# Altium PCB Z80-ays.PcbDoc
Units mil, origin at the board's own origin, x right, y up, seen from the top; angles counter-clockwise.
Board outline 3800 x 3500 mil, 2 copper layers (TopLayer, BottomLayer); 58 components, 79 nets, 269 pads, 31 vias.
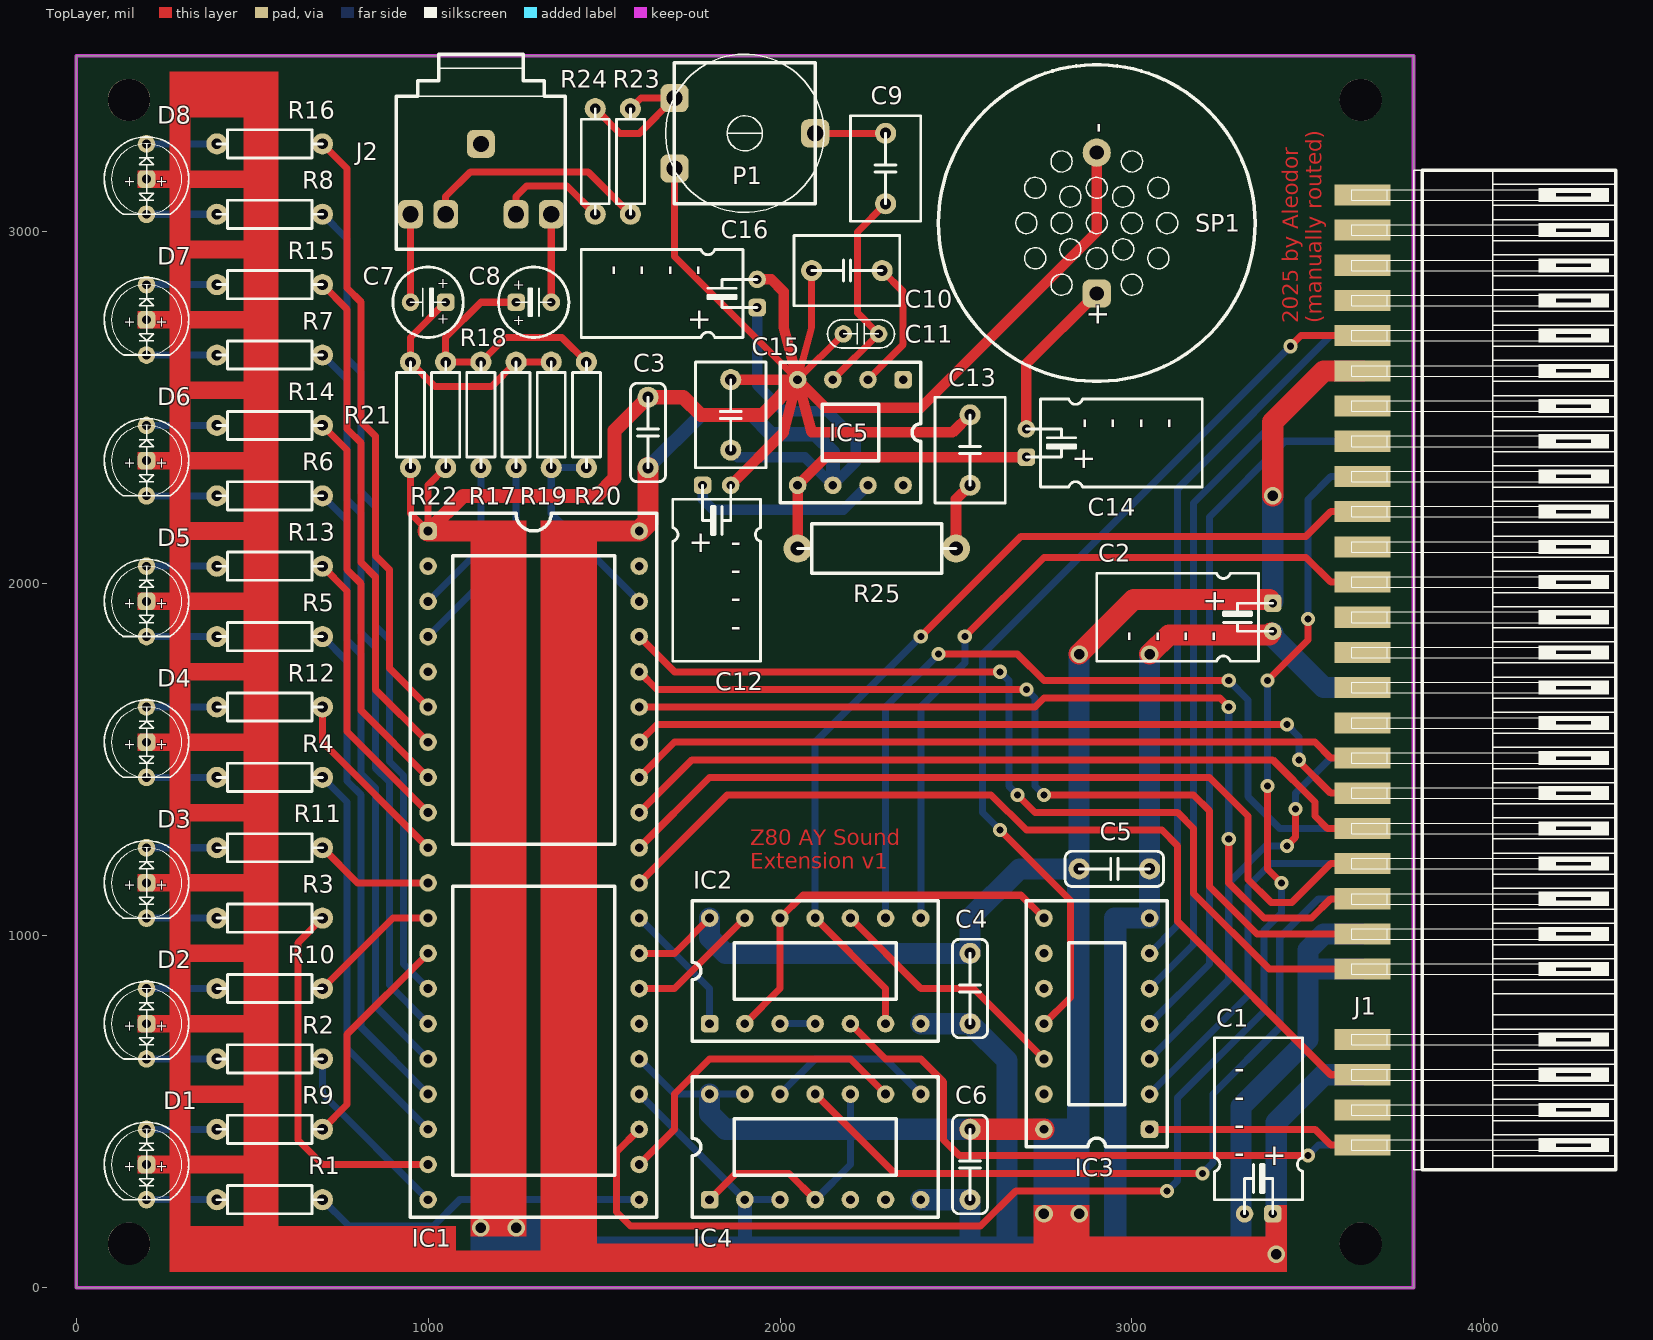
[diagram p0: TopLayer view]
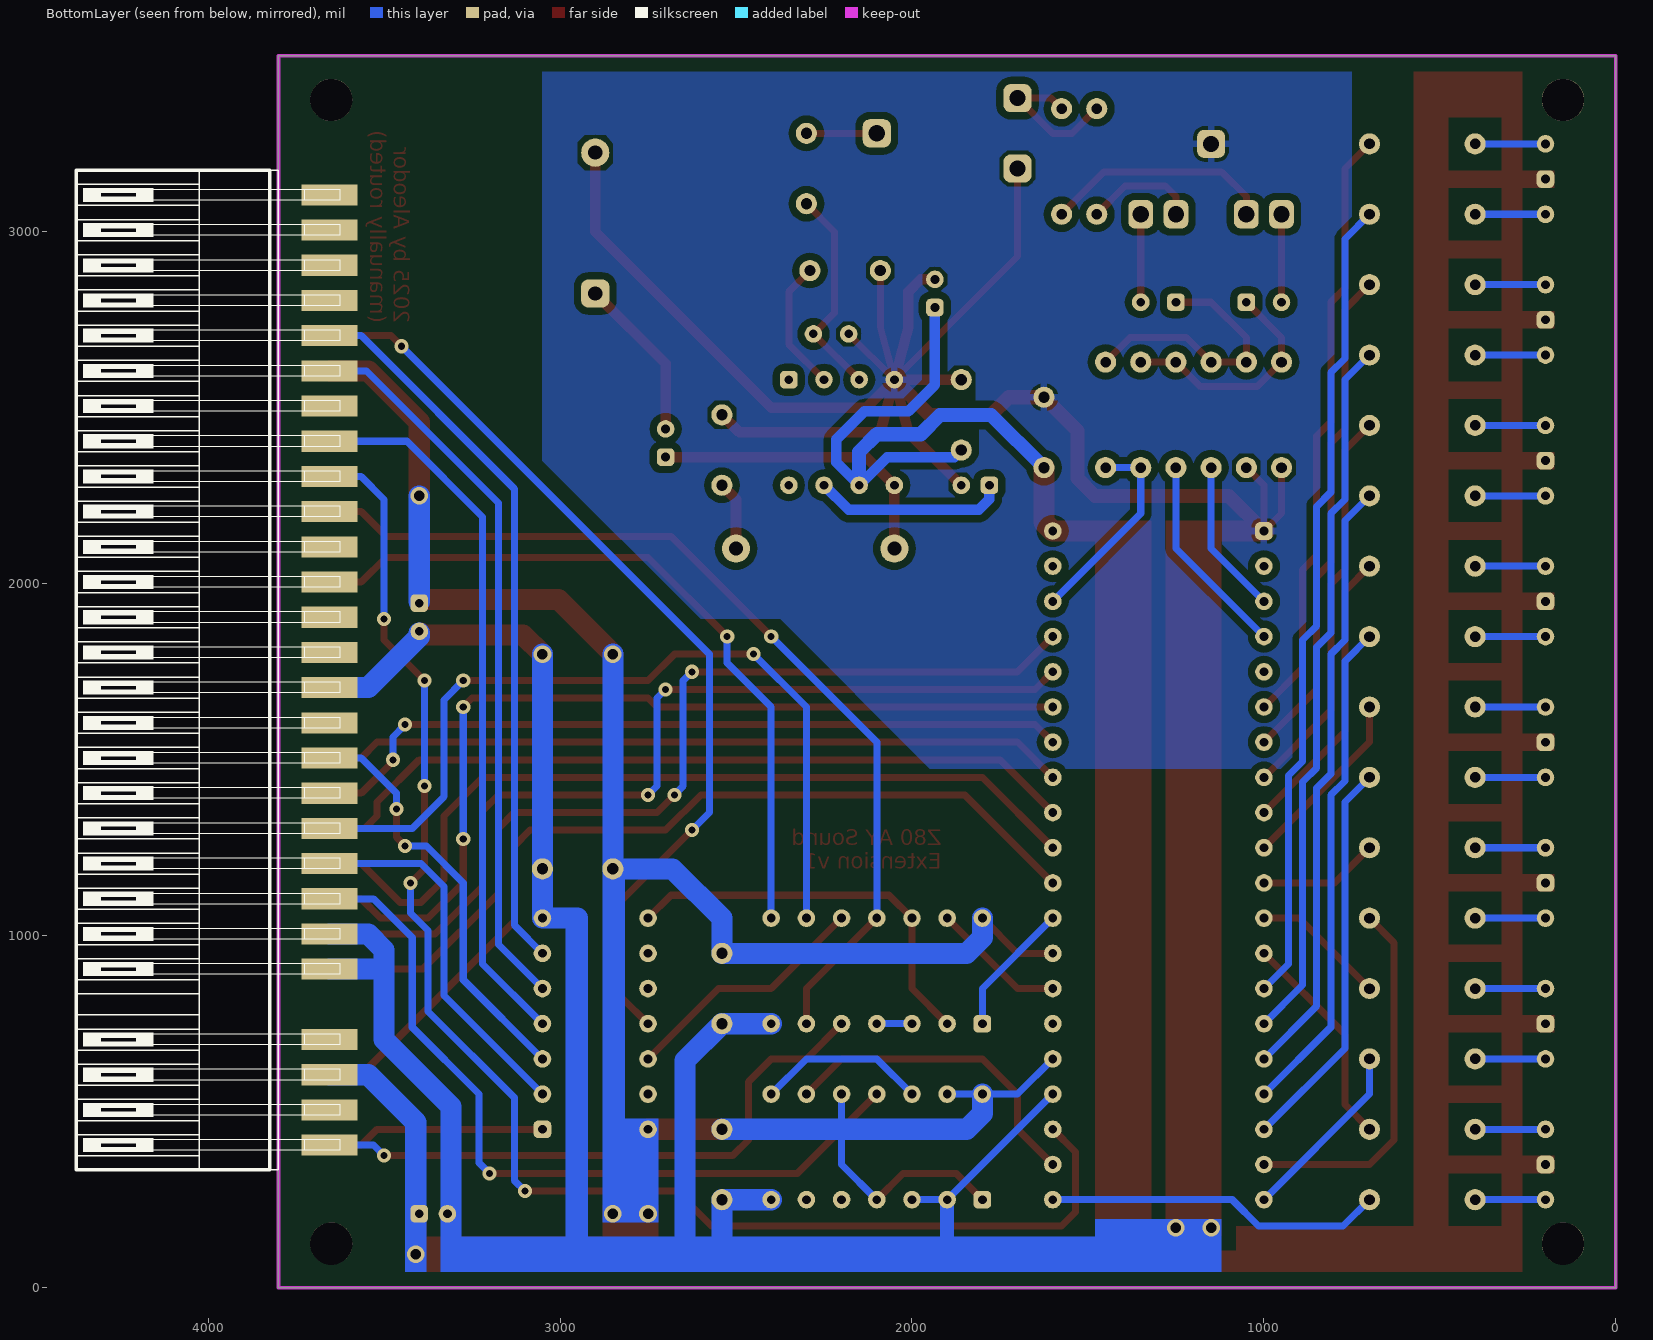
[diagram p1: BottomLayer view, seen from below]

## Layer stack, top to bottom
TopSolder: solder mask 0.4, Solder Resist, Dk 3.5
TopLayer: signal copper 1.4
Dielectric1: core 12.6, FR-4, Dk 4.8
BottomLayer: signal copper 1.4
BottomSolder: solder mask 0.4, Solder Resist, Dk 3.5

## Board outline
0,0 0,3500 3800,3500 3800,0

## Design rules (kind name [scope] priority, off if disabled: settings)
AcuteAngle [All] p1: minimum=6.00000000000000E+0001 checktracksonly=FALSE
Clearance Clearance_Track-Track [(IsTrack) vs (IsTrack)] p1: gap=20
Clearance Clearance_Track-Fill [(IsTrack) vs (IsFill)] p2: gap=20
Clearance Clearance_Fill-Fill [(IsFill) vs (IsFill)] p3: gap=40
Clearance Clearance_All-All [All] p4: gap=20
ComponentClearance [All] p1: gap=0 collisioncheckmode=3 verticalgap=0 showdistances=FALSE
FabricationTestPointUsage TestPointUsage [All] p1: valid=0 allowmultiple=FALSE
FabricationTestpoint Testpoint [All] p1: side=3 testpointundercomponent=TRUE minsize=40 maxsize=100 preferedsize=60 minholesize=0 maxholesize=40 preferedholesize=32 testpointgrid=1 allowsidetop=TRUE allowsidebottom=TRUE usegrid=TRUE gridtolerance=0.01
Height [All] p1: minheight=0 maxheight=0 prefheight=0
HoleSize [All] p1: absolutevalues=TRUE maxlimit=120 minlimit=20 maxpercent=80.000 minpercent=20.000
HoleToHoleClearance [All] p1: gap=20 allowstackedmicrovias=TRUE
PolygonConnect PolygonConnect_Via [(IsVia)] p1: connectstyle=Direct reliefconductorwidth=10 reliefentries=4 polygonreliefangle="90 Angle" airgapwidth=10
PolygonConnect [All] p2: connectstyle=Relief reliefconductorwidth=20 reliefentries=4 polygonreliefangle="90 Angle" airgapwidth=10
RoutingVias [All] p1: holewidth=20 width=40 viastyle="Through Hole" minholewidth=20 minwidth=40 maxholewidth=30 maxwidth=50
SilkToSolderMaskClearance SilkscreenOverComponentPads [IsPad] p1: minsilkscreentomaskgap=10 clearancetoexposedcopper=TRUE
SolderMaskExpansion [All] p1: expansion=4
Width [All] p1: maxlimit=100 minlimit=10 preferedwidth=10
23 further rules are at their usual default settings.

## Classes and differential pairs
net class DB[7..0]: DB0 DB1 DB2 DB3 DB4 DB5 DB6 DB7
net class AB[15..0]: AB0 AB1 AB2 AB3 AB4 AB5 AB6 AB7 AB8 AB9 AB10 AB11 AB12 AB13 AB14 AB15

## Components (designator, comment, footprint, x,y, rotation, side; value= is the part's Value field where it differs from the comment)
C1 "100u" C-ELKO_2D6L11.7 3360,210 r180 top locked
C2 "100u" C-ELKO_2D6L11.7 3400,1905 r270 top locked
C3 "120n" C-CER_0.2W2.5L7 1625,2430 r90 top locked
C4 "120n" C-CER_0.2W2.5L7 2540,850 r270 top locked
C5 "120n" C-CER_0.2W2.5L7 2950,1190 r0 top locked
C6 "120n" C-CER_0.2W2.5L7 2540,350 r270 top locked
C7 "10u" C-ELKO_0.1D5 1000,2800 r180 top locked
C8 "10u" C-ELKO_0.1D5 1300,2800 r0 top locked
C9 "220n" C-FILM_0.2W5L7.5 2300,3180 r270 top locked
C10 "220n" C-FILM_0.2W5L7.5 2190,2890 r180 top locked
C11 "220p" C-CER_0.1W2L4.8 2230,2710 r180 top locked
C12 "100u" C-ELKO_2D6L11.7 1820,2280 r0 top locked
C13 "220n" C-FILM_0.2W5L7.5 2540,2380 r270 top locked
C14 "220u" C-ELKO_2D6L11.7 2700,2400 r90 top locked
C15 "220n" C-FILM_0.2W5L7.5 1860,2480 r90 top locked
C16 "220u" C-ELKO_2D6L11.7R 1935,2825 r270 top locked
D1 "LDRG" LED_0.1X2D5 200,350 r270 top locked
D2 "LDRG" LED_0.1X2D5 200,750 r270 top locked
D3 "LDRG" LED_0.1X2D5 200,1150 r270 top locked
D4 "LDRG" LED_0.1X2D5 200,1550 r270 top locked
D5 "LDRG" LED_0.1X2D5 200,1950 r270 top locked
D6 "LDRG" LED_0.1X2D5 200,2350 r270 top locked
D7 "LDRG" LED_0.1X2D5 200,2750 r270 top locked
D8 "LDRG" LED_0.1X2D5 200,3150 r270 top locked
IC1 "AY3-8910" IC40_DIP_W 1300,1200 r0 top locked
IC2 "74HCT02" IC14_DIP 2100,900 r90 top locked
IC3 "74HCT30" IC14_DIP 2900,750 r180 top locked
IC4 "74HCT74" IC14_DIP 2100,400 r90 top locked
IC5 "LM386" IC8_DIP 2200,2430 r270 top locked
J1 "HC-EXT_28X2" ISA_TH/SMD_28X2 4000,1755 r270 top locked
J2 "JACK_ST" JACK_ST_SW 1150,3250 r0 top locked
P1 "10K" POT-B_10x10 1900,3280 r270 top locked
R1 "3K3" AXIAL_0.3D2 550,250 r180 top locked
R2 "3K3" AXIAL_0.3D2 550,650 r180 top locked
R3 "3K3" AXIAL_0.3D2 550,1050 r180 top locked
R4 "3K3" AXIAL_0.3D2 550,1450 r180 top locked
R5 "3K3" AXIAL_0.3D2 550,1850 r180 top locked
R6 "3K3" AXIAL_0.3D2 550,2250 r180 top locked
R7 "3K3" AXIAL_0.3D2 550,2650 r180 top locked
R8 "3K3" AXIAL_0.3D2 550,3050 r180 top locked
R9 "10K" AXIAL_0.3D2 550,450 r180 top locked
R10 "10K" AXIAL_0.3D2 550,850 r180 top locked
R11 "10K" AXIAL_0.3D2 550,1250 r180 top locked
R12 "10K" AXIAL_0.3D2 550,1650 r180 top locked
R13 "10K" AXIAL_0.3D2 550,2050 r180 top locked
R14 "10K" AXIAL_0.3D2 550,2450 r180 top locked
R15 "10K" AXIAL_0.3D2 550,2850 r180 top locked
R16 "10K" AXIAL_0.3D2 550,3250 r180 top locked
R17 "390" AXIAL_0.3D2 1250,2480 r90 top locked
R18 "390" AXIAL_0.3D2 1150,2480 r90 top locked
R19 "820" AXIAL_0.3D2 1350,2480 r90 top locked
R20 "820" AXIAL_0.3D2 1450,2480 r90 top locked
R21 "470" AXIAL_0.3D2 950,2480 r270 top locked
R22 "470" AXIAL_0.3D2 1050,2480 r270 top locked
R23 "10K" AXIAL_0.3D2 1575,3200 r90 top locked
R24 "10K" AXIAL_0.3D2 1475,3200 r270 top locked
R25 "10W" AXIAL_0.45D3.5 2275,2100 r0 top locked
SP1 "8W" SPKR_8.8D23 2900,3025 r90 top locked

## Footprints (in the part's own frame and the unit in brackets; to place one, negate y for a bottom-side part, rotate by r counter-clockwise, add the part's x,y. Pads: shape width x height; smd on the part's side, far side on the other; paste and mask are expansions set on the pad)
AXIAL_0.3D2 [mil]
  round 60 hole 30: 1(-150,0) 2(150,0)
  silkscreen extent -150,-40 150,40
AXIAL_0.45D3.5 [mil]
  round 80 hole 40: 1(-225,0) 2(225,0)
  silkscreen extent -225,-70 225,70
C-CER_0.1W2L4.8 [mil]
  round 50 hole 24: 1(-50,0) 2(50,0)
  silkscreen extent -95,-40 95,40
C-CER_0.2W2.5L7 [mil]
  round 60 hole 32: 1(-100,0) 2(100,0)
  silkscreen extent -140,-50 140,50
C-ELKO_0.1D5 [mil]
  rrect50% 50x50 hole 25: 1(-50,0)
  round 50 hole 25: 2(50,0)
  silkscreen extent -100,-100 100,100
C-ELKO_2D6L11.7 [mil]
  rrect50% 50x50 hole 25: 1(-40,0)
  round 50 hole 25: 2(40,0)
  silkscreen extent -125,-500 125,0
C-ELKO_2D6L11.7R [mil]
  rrect50% 50x50 hole 25: 1(40,0)
  round 50 hole 25: 2(-40,0)
  silkscreen extent -125,-500 125,0
C-FILM_0.2W5L7.5 [mil]
  round 60 hole 32: 1(-100,0) 2(100,0)
  silkscreen extent -150,-100 150,100
IC8_DIP [mil]
  rrect50% 50x50 hole 25: 1(-150,150)
  round 50 hole 25: 2(-150,50) 3(-150,-50) 4(-150,-150) 5(150,-150) 6(150,-50) 7(150,50) 8(150,150)
  silkscreen extent -200,-200 200,200
IC14_DIP [mil]
  rrect50% 50x50 hole 25: 1(-150,300)
  round 50 hole 25: 2(-150,200) 3(-150,100) 4(-150,0) 5(-150,-100) 6(-150,-200) 7(-150,-300) 8(150,-300) 9(150,-200) 10(150,-100) 11(150,0) 12(150,100) 13(150,200) 14(150,300)
  silkscreen extent -200,-350 200,350
IC40_DIP_W [mil]
  rrect50% 50x50 hole 25: 1(-300,950)
  round 50 hole 25: 2(-300,850) 3(-300,750) 4(-300,650) 5(-300,550) 6(-300,450) 7(-300,350) 8(-300,250) 9(-300,150) 10(-300,50) 11(-300,-50) 12(-300,-150) 13(-300,-250) 14(-300,-350) 15(-300,-450) 16(-300,-550) 17(-300,-650) 18(-300,-750) 19(-300,-850) 20(-300,-950) 21(300,-950) 22(300,-850) 23(300,-750) 24(300,-650) 25(300,-550) 26(300,-450) 27(300,-350) 28(300,-250) 29(300,-150) 30(300,-50) 31(300,50) 32(300,150) 33(300,250) 34(300,350) 35(300,450) 36(300,550) 37(300,650) 38(300,750) 39(300,850) 40(300,950)
  silkscreen extent -350,-1000 350,1000
ISA_TH/SMD_28X2 [mil]
  rect 60x160 smd: 1(1350,-345) 3(1250,-345) 5(1150,-345) 7(1050,-345) 11(850,-345) 13(750,-345) 15(650,-345) 17(550,-345) 19(450,-345) 21(350,-345) 23(250,-345) 25(150,-345) 27(50,-345) 29(-50,-345) 31(-150,-345) 33(-250,-345) 35(-350,-345) 37(-450,-345) 39(-550,-345) 41(-650,-345) 43(-750,-345) 45(-850,-345) 47(-950,-345) 49(-1050,-345) 51(-1150,-345) 53(-1250,-345) 55(-1350,-345)
  rect 60x160 smd far side: 2(1350,-345) 4(1250,-345) 6(1150,-345) 8(1050,-345) 12(850,-345) 14(750,-345) 16(650,-345) 18(550,-345) 20(450,-345) 22(350,-345) 24(250,-345) 26(150,-345) 28(50,-345) 30(-50,-345) 32(-150,-345) 34(-250,-345) 36(-350,-345) 38(-450,-345) 40(-550,-345) 42(-650,-345) 44(-750,-345) 46(-850,-345) 48(-950,-345) 50(-1050,-345) 52(-1150,-345) 54(-1250,-345) 56(-1350,-345)
  silkscreen extent -1420,-375 1420,375
JACK_ST_SW [mil]
  round 40 on Top Overlay: 0(-200,0) 0(-200,100) 0(0,-200) 0(200,0) 0(200,100)
  rrect50% 80x80 hole 46: 1(0,0)
  rrect50% 70x80 hole 46: 2(200,-200) 3(100,-200) 4(-100,-200) 5(-200,-200)
  silkscreen extent -240,-300 240,255
LED_0.1X2D5 [mil]
  rrect50% 50x50 hole 25: A(0,0)
  round 50 hole 25: K1(100,0) K2(-100,0)
  silkscreen extent -120,-120 100,120
POT-B_10x10 [mil]
  rrect50% 80x80 hole 46: 1(-100,-200) 2(100,-200) 3(0,200)
  silkscreen extent -225,-225 225,225
SPKR_8.8D23 [mil]
  rrect50% 80x80 hole 40: 1(-200,0)
  round 80 hole 40: 2(200,0)
  silkscreen extent -450,-450 450,450

## Part data
C1 C2 C7 C8 C12 C14 C16: library part C-ELKO_20MIL
C3 C4 C5 C6 C9 C10 C11 C13 C15: library part CAP_20MIL
D1 D2 D3 D4 D5 D6 D7 D8: library part LED_AKK
J2: library part JACK_ST_SW
P1: library part POT-20MIL
R1 R2 R3 R4 R5 R6 R7 R8 R9 R10 R11 R12 R13 R14 R15 R16 R17 R18 R19 R20 R21 R22 R23 R24: library part RES-20MIL
R25: library part RES-30MIL
SP1: library part SPEAKER

## Free pads (board coordinates)
  round 120 hole 120 unplated: 0(150,125) 0(150,3375) 0(3650,125) 0(3650,3375)

## Via types
v1: diameter 40, hole 20, TopLayer to BottomLayer, 23 vias
v2: diameter 50, hole 30, TopLayer to BottomLayer, 8 vias

## Nets (pads, with @x,y where several pads share a name; then routed paths per layer and width w, separated by ;. In a path a pad name is that pad's centre, name@x,y a point inside that pad or via, vN(x,y) a via of type N, cw(c..) or ccw(c..) an arc to the next point about the centre after c; other vN are vias at no path point)
AB0: IC3.2 J1.18 | length 1057.9
  BottomLayer w20: IC3.2 3330,830 3330,1140 3395,1205 J1.18
AB1: IC2.9 J1.20 | length 2383.3
  TopLayer w20: v1(2450,1800) 2675,1800 2750,1725 v1(3275,1725)
  BottomLayer w20: IC2.9 2300,1650 v1(2450,1800) ; v1(3275,1725) 3330,1670 3330,1395 3420,1305 J1.20
AB3: IC3.3 J1.24 | length 1193.5
  TopLayer w20: v1(3440,1255) 3465,1280 v1(3465,1360)
  BottomLayer w20: IC3.3 3275,875 3275,1150 3380,1255 v1(3440,1255) ; v1(3465,1360) 3465,1405 3565,1505 J1.24
AB4: IC3.6 J1.48 | length 2058.3
  BottomLayer w20: IC3.6 3130,1030 3130,2270 3565,2705 J1.48
AB5: IC3.5 J1.46 | length 2067.1
  BottomLayer w20: IC3.5 3175,975 3175,2230 3550,2605 J1.46
AB7: IC3.4 J1.42 | length 2034.5
  BottomLayer w20: IC3.4 3220,920 3220,2190 3435,2405 J1.42
AB14: IC2.5 J1.2 | length 1719.4
  TopLayer w20: IC2.5 2300,650 2400,650 2465,585 2465,420 2510,375 v1(3500,375)
  BottomLayer w20: v1(3500,375) 3530,405 J1.2
AB15: IC3.1 J1.1 | length 623.6
  TopLayer w20: IC3.1 3520,450 3565,405 J1.1
CASL: IC4.11 J1.16 | length 2234.9
  TopLayer w20: IC4.11 2325,325 v1(3200,325)
  BottomLayer w20: v1(3200,325) 3230,355 3230,550 3420,740 3420,995 3530,1105 J1.16
DB0: IC1.37 J1.11 | length 2730.5
  TopLayer w20: IC1.37 1700,1750 v1(2625,1750) ; v1(2675,1400) 2725,1350 3130,1350 3175,1305 3175,1120 3390,905 J1.11
  BottomLayer w20: v1(2625,1750) 2650,1725 2650,1425 v1(2675,1400)
DB1: IC1.36 J1.13 | length 2636
  TopLayer w20: IC1.36 1650,1700 v1(2700,1700) ; v1(2750,1400) 3175,1400 3220,1355 3220,1140 3355,1005 J1.13
  BottomLayer w20: v1(2700,1700) 2725,1675 2725,1425 v1(2750,1400)
DB2: IC1.35 J1.15 | length 2639.9
  TopLayer w20: IC1.35 2725,1650 2750,1675 3250,1675 v1(3275,1650) ; v1(3275,1275) 3275,1150 3375,1050 3510,1050 3565,1105 J1.15
  BottomLayer w20: v1(3275,1275) v1(3275,1650)
DB3: IC1.34 J1.21 | length 2197.5
  TopLayer w20: IC1.34 1650,1600 v1(3440,1600) ; v1(3475,1500) 3475,1495 3565,1405 J1.21
  BottomLayer w20: v1(3440,1600) 3475,1565 v1(3475,1500)
DB4: IC1.33 J1.23 | length 2115.1
  TopLayer w20: IC1.33 1700,1550 3520,1550 3565,1505 J1.23
DB5: IC1.32 J1.19 | length 2221.3
  TopLayer w20: IC1.32 1750,1500 3400,1500 3520,1380 3520,1340 3555,1305 J1.19
DB6: IC1.31 J1.17 | length 2435.9
  TopLayer w20: IC1.31 1800,1450 3220,1450 3330,1340 3330,1160 3395,1095 3455,1095 3565,1205 J1.17
DB7: IC1.30 J1.5 | length 2613.8
  TopLayer w20: IC1.30 1850,1400 2600,1400 2700,1300 3085,1300 3130,1255 3130,1040 3565,605 J1.5
GND: C1.2 C2.2 C3.2 C4.2 C5.2 C6.2 C10.2 C11.2 C12.2 C13.1 C15.2 C16.2 IC1.1 IC1.24 IC2.7 IC3.7 IC4.2 IC4.3 IC4.7 IC5.4 J1.12 J1.14 J1.28 J2.1 P1.2 R21.2 R22.2 SP1.2 | length 10017.4
  TopLayer w20: R21.2 950,2200 IC1.1 1000,2280 R22.2 ; P1.2 1700,2930 IC5.4 ; C10.2 2090,2730 IC5.4 ; C11.2 IC5.4
  TopLayer w30: C12.2 2010,2430 IC5.4 ; C15.2 IC5.4 ; C16.2 1975,2865 2010,2830 2010,2730 IC5.4 ; C13.1 2490,2430 2090,2430 IC5.4 ; SP1.2 2900,3000 2400,2500 2130,2500 IC5.4
  TopLayer w40: IC1.1 1100,2250 1480,2250 1530,2300 1530,2435 C3.2 1725,2530 1775,2480 1950,2480 IC5.4
  TopLayer w60: IC1.1 1120,2150 ; v2(3050,1800) 3105,1855 3390,1855 C2.2@3395,1860
  BottomLayer w20: IC1.24 IC4.2 IC4.3
  BottomLayer w40: 1900,145 IC4.2
  BottomLayer w60: IC4.7 C6.2 2540,145 ; IC2.7 C4.2 2645,645 2645,145 ; 2950,1050 IC3.7 C5.2 v2(3050,1800) ; 3310,515 3500,705 3500,905 ; C2.2@3400,1860 3400,1850 3545,1705 J1.28 ; J1.12 3500,905 ; J1.14 3545,1005 3500,960 3500,905
  other v2: 1150,170 1250,170
IORQL: IC2.8 J1.33 | length 2104
  TopLayer w20: v1(2525,1850) 2750,2075 3495,2075 3565,2005 J1.33
  BottomLayer w20: IC2.8 2400,1650 2525,1775 v1(2525,1850)
M1L: IC3.11 J1.47 | length 2639.5
  TopLayer w20: v1(2625,1300) 2825,1100 2825,825 IC3.11 ; v1(3450,2675) 3480,2705 J1.47
  BottomLayer w20: v1(2625,1300) 2575,1350 2575,1800 v1(3450,2675)
NetC7_1: C7.1 R17.2 R19.2 R21.1 | length 669.4
  TopLayer w20: C7.1 950,2700 R21.1 1020,2560 1180,2560 R17.2 R19.2
NetC7_2: C7.2 J2.5 | length 250
  TopLayer w20: C7.2 J2.5
NetC8_1: C8.1 R18.2 R20.2 R22.1 | length 769.4
  TopLayer w20: C8.1 1150,2800 1050,2700 R22.1 R18.2 1220,2700 1380,2700 R20.2
NetC8_2: C8.2 J2.2 | length 250
  TopLayer w20: C8.2 J2.2
NetC9_1: C9.1 P1.3 | length 200
  TopLayer w20: P1.3 C9.1
NetC9_2: C9.2 C11.1 IC5.3 | length 611.8
  TopLayer w20: IC5.3 C11.1 2220,2770 2220,3000 C9.2
NetC10_1: C10.1 IC5.2 | length 376.3
  TopLayer w20: IC5.2 2350,2680 2350,2830 C10.1
NetC12_1: C12.1 IC5.7 | length 551.4
  BottomLayer w30: C12.1 1780,2240 1810,2210 2180,2210 IC5.7
NetC13_2: C13.2 R25.2 | length 196.6
  TopLayer w30: R25.2 2500,2240 C13.2
NetC14_1: C14.1 IC5.5 R25.1 | length 863.1
  TopLayer w30: R25.1 IC5.5 2130,2360 C14.1
NetC14_2: C14.2 SP1.1 | length 467.8
  TopLayer w30: C14.2 2700,2625 SP1.1
NetD1_K1: D1.K1 R1.2 | length 200
  BottomLayer w20: D1.K1 R1.2
NetD1_K2: D1.K2 R9.2 | length 200
  BottomLayer w20: D1.K2 R9.2
NetD2_K1: D2.K1 R2.2 | length 200
  BottomLayer w20: D2.K1 R2.2
NetD2_K2: D2.K2 R10.2 | length 200
  BottomLayer w20: D2.K2 R10.2
NetD3_K1: D3.K1 R3.2 | length 200
  BottomLayer w20: D3.K1 R3.2
NetD3_K2: D3.K2 R11.2 | length 200
  BottomLayer w20: D3.K2 R11.2
NetD4_K1: D4.K1 R4.2 | length 200
  BottomLayer w20: D4.K1 R4.2
NetD4_K2: D4.K2 R12.2 | length 200
  BottomLayer w20: D4.K2 R12.2
NetD5_K1: D5.K1 R5.2 | length 200
  BottomLayer w20: D5.K1 R5.2
NetD5_K2: D5.K2 R13.2 | length 200
  BottomLayer w20: D5.K2 R13.2
NetD6_K1: D6.K1 R6.2 | length 200
  BottomLayer w20: D6.K1 R6.2
NetD6_K2: D6.K2 R14.2 | length 200
  BottomLayer w20: D6.K2 R14.2
NetD7_K1: D7.K1 R7.2 | length 200
  BottomLayer w20: D7.K1 R7.2
NetD7_K2: D7.K2 R15.2 | length 200
  BottomLayer w20: D7.K2 R15.2
NetD8_K1: D8.K1 R8.2 | length 200
  BottomLayer w20: D8.K1 R8.2
NetD8_K2: D8.K2 R16.2 | length 200
  BottomLayer w20: D8.K2 R16.2
NetIC1_3: IC1.3 R18.1 | length 442.1
  BottomLayer w20: IC1.3 1150,2100 R18.1
NetIC1_4: IC1.4 R17.1 | length 583.6
  BottomLayer w20: IC1.4 1250,2100 R17.1
NetIC1_6: IC1.6 R16.1 | length 1724.3
  TopLayer w20: R16.1 770,3180 770,2840 810,2800 810,2460 850,2420 850,2080 890,2040 890,1760 IC1.6
NetIC1_7: IC1.7 R15.1 | length 1424.3
  TopLayer w20: R15.1 770,2780 770,2440 810,2400 810,2060 850,2020 850,1700 IC1.7
NetIC1_8: IC1.8 R14.1 | length 1124.3
  TopLayer w20: R14.1 770,2380 770,2040 810,2000 810,1640 IC1.8
NetIC1_9: IC1.9 R13.1 | length 824.3
  TopLayer w20: R13.1 770,1980 770,1580 IC1.9
NetIC1_10: IC1.10 R12.1 | length 524.3
  TopLayer w20: R12.1 700,1550 IC1.10
NetIC1_11: IC1.11 R11.1 | length 341.4
  TopLayer w20: R11.1 800,1150 IC1.11
NetIC1_12: IC1.12 R10.1 | length 382.8
  TopLayer w20: R10.1 900,1050 IC1.12
NetIC1_13: IC1.13 R9.1 | length 624.3
  TopLayer w20: R9.1 770,520 770,720 IC1.13
NetIC1_14: IC1.14 R8.1 | length 2324.3
  BottomLayer w20: R8.1 770,2980 770,2640 810,2600 810,2260 850,2220 850,1880 890,1840 890,1495 930,1455 930,920 IC1.14
NetIC1_15: IC1.15 R7.1 | length 2024.3
  BottomLayer w20: R7.1 770,2580 770,2240 810,2200 810,1860 850,1820 850,1476.57 890,1436.57 890,860 IC1.15
NetIC1_16: IC1.16 R6.1 | length 1724.3
  BottomLayer w20: R6.1 770,2180 770,1840 810,1800 810,1460 850,1420 850,800 IC1.16
NetIC1_17: IC1.17 R5.1 | length 1424.3
  BottomLayer w20: R5.1 770,1780 770,1440 810,1400 810,740 IC1.17
NetIC1_18: IC1.18 R4.1 | length 1124.3
  BottomLayer w20: R4.1 770,1380 770,680 IC1.18
NetIC1_19: IC1.19 R3.1 | length 1058
  TopLayer w20: R3.1 630,980 630,420 700,350 IC1.19
NetIC1_20: IC1.20 R2.1 | length 524.3
  BottomLayer w20: R2.1 700,550 IC1.20
NetIC1_21: IC1.21 R1.1 | length 962.1
  BottomLayer w20: R1.1 775,175 1015,175 1090,250 IC1.21
NetIC1_22: IC1.22 IC4.9 | length 924.3
  TopLayer w20: IC1.22 1700,450 1700,550 1800,650 2200,650 IC4.9
NetIC1_27: IC1.27 IC2.13 | length 382.8
  TopLayer w20: IC1.27 1700,850 IC2.13
NetIC1_29: IC1.29 IC2.1 | length 382.8
  BottomLayer w20: IC1.29 1800,850 IC2.1
NetIC1_38: IC1.38 R19.1 R20.1 | length 583.6
  BottomLayer w20: R20.1 R19.1 1350,2200 IC1.38
NetIC2_2: IC2.2 IC2.12 IC3.8 | length 1145.3
  TopLayer w20: IC2.2 2000,850 IC2.12 2065,1115 2685,1115 IC3.8
NetIC2_3: IC2.3 IC2.4 | length 100
  BottomLayer w20: IC2.3 IC2.4
NetIC2_10: IC2.10 IC3.12 | length 715.7
  TopLayer w20: IC2.10 2400,850 2550,850 IC3.12
NetIC4_8: IC4.8 IC4.12 | length 482.8
  BottomLayer w20: IC4.12 2100,650 2300,650 IC4.8
NetJ2_3: J2.3 R24.2 | length 320.6
  TopLayer w20: J2.3 1250,3100 1280,3130 1395,3130 R24.2
NetJ2_4: J2.4 R23.1 | length 653.7
  TopLayer w20: J2.4 1050,3100 1120,3170 1455,3170 R23.1
NetP1_1: P1.1 R23.2 R24.1 | length 432.8
  TopLayer w20: R24.1 1545,3280 1600,3280 P1.1 1605,3380 R23.2
RESL: IC1.23 J1.40 | length 4230.7
  TopLayer w20: IC1.23 1535,385 1535,215 1575,175 2570,175 2670,275 v1(3100,275) ; v1(3385,1425) 3385,1190 v1(3425,1150) ; v1(3385,1725) 3500,1840 v1(3500,1900)
  BottomLayer w20: v1(3100,275) 3130,305 3130,540 3375,785 3375,1015 3425,1065 v1(3425,1150) ; v1(3385,1425) v1(3385,1725) ; v1(3500,1900) 3500,2240 3565,2305 J1.40
VCC: C1.1 C2.1 C3.1 C4.1 C5.1 C6.1 C15.1 C16.1 D1.A D2.A D3.A D4.A D5.A D6.A D7.A D8.A IC1.25 IC1.28 IC1.40 IC2.14 IC3.14 IC4.1 IC4.4 IC4.10 IC4.13 IC4.14 IC5.6 J1.6 J1.45 | length 8026.8
  TopLayer w20: IC1.28 1700,950 IC2.14 ; IC4.1 1874.22,324.22 2025.78,324.22 IC4.4
  TopLayer w60: 1480,2150 IC1.40 1625,2175 C3.1 ; C6.1 IC3.14 ; v2(2850,1800) 3005,1955 3390,1955 C2.1@3395,1950 ; v2(3400,2250) 3400,2460 3545,2605 J1.45
  BottomLayer w20: IC1.25 1700,550 IC4.14 IC4.13 ; IC4.4 2200,350 2200,450 IC4.10
  BottomLayer w30: C15.1 1880,2360 2070,2360 IC5.6 2215,2345 2215,2410 2135,2490 2010,2490 1935,2565 C16.1
  BottomLayer w40: C3.1 1775,2480 1920,2480 1975,2425 2100,2425 2150,2375 IC5.6
  BottomLayer w60: IC4.14 1800,495 1845,450 2200,450 C6.1 ; IC2.14 1800,995 1845,950 C4.1 2540,1050 2680,1190 C5.1 v2(2850,1800) ; C2.1@3400,1950 v2(3400,2250) ; 3410,470 3545,605 J1.6
  other v2: 3410,95 2750,210 2850,210
WRL: IC2.6 IC2.11 J1.37 | length 2709.2
  TopLayer w20: IC2.11 2300,850 IC2.6 ; v1(2400,1850) 2685,2135 3495,2135 3565,2205 J1.37
  BottomLayer w20: IC2.11 2100,1550 v1(2400,1850)
pads on no net: IC1.2 IC1.5 IC1.26 IC1.39 IC3.9 IC3.10 IC3.13 IC4.5 IC4.6 IC5.1 IC5.8 J1.3 J1.4 J1.7 J1.8 J1.22 J1.25 J1.26 J1.27 J1.29 J1.30 J1.31 J1.32 J1.34 J1.35 J1.36 J1.38 J1.39 J1.41 J1.43 J1.44 J1.49 J1.50 J1.51 J1.52 J1.53 J1.54 J1.55 J1.56 J2.0

## Polygon pours and split planes (outlines as drawn)
GND on BottomLayer "GND_L02_P006" (solid, remove dead copper, pour order 6): 750,3455 3050,3455 3050,2550 3050,2350 2600,1900 2375,1900 1950,1475 750,1475

## Keep-outs
KeepOutLayer:
  the board outline again, w10

## Other copper
TopLayer:
  rectangle net VCC: 3400,185 3440,235
  rectangle net VCC: 3380,45 3440,210
  rectangle net VCC: 2720,45 2880,235
  rectangle net VCC: 2720,45 3440,145
  rectangle net VCC: 1320,45 3440,125
  rectangle net VCC: 265,45 3440,105
  rectangle net VCC: 265,3325 575,3455
  rectangle net VCC: 265,2925 575,2975
  rectangle net VCC: 265,2525 575,2575
  rectangle net VCC: 265,2125 575,2175
  rectangle net VCC: 265,1725 575,1775
  rectangle net VCC: 265,1325 575,1375
  rectangle net VCC: 265,925 575,975
  rectangle net VCC: 265,45 1080,175
  rectangle net VCC: 265,525 575,575
  rectangle net VCC: 175,3125 575,3175
  rectangle net VCC: 175,2725 575,2775
  rectangle net VCC: 175,2325 575,2375
  rectangle net VCC: 175,1925 575,1975
  rectangle net VCC: 175,1525 575,1575
  rectangle net VCC: 175,1125 575,1175
  rectangle net VCC: 175,725 575,775
  rectangle net VCC: 175,325 575,375
  rectangle net VCC: 265,45 325,3455
  rectangle net VCC: 475,45 575,3455
  rectangle net GND: 1120,145 1280,2180
  rectangle net VCC: 1320,45 1480,2180
  text "2025 by Aleodor / (manually routed)" at 3540,2740 h45 r90
  text "Z80 AY Sound / Extension v1" at 1915,1190 h45
BottomLayer:
  rectangle net GND: 3280,45 3340,515
  rectangle net VCC: 3380,45 3440,470
  rectangle net VCC: 2720,185 2880,480
  rectangle net GND: 1120,45 3340,145
  rectangle net GND: 1120,45 1480,195
  rectangle net VCC: 2815,185 2880,1220
  rectangle net GND: 2920,45 2985,1050
  pour cut-out: 1900,2520 1900,2580 1820,2580 1820,2520
  pour cut-out: 1810,2440 1810,2380 1910,2380 1910,2440
  pour cut-out: 2850,3195 2870,3175 2930,3175 2950,3195 2950,3255 2930,3275 2870,3275 2850,3250
  pour cut-out: 1650,3150 1670,3130 1730,3130 1750,3150 1750,3210 1730,3230 1670,3230 1650,3205
  pour cut-out: 2145,2695 2165,2675 2195,2675 2215,2695 2215,2725 2195,2745 2165,2745 2145,2725
  pour cut-out: 1825,2265 1845,2245 1875,2245 1895,2265 1895,2295 1875,2315 1845,2315 1825,2295
  pour cut-out: 2860,3205 2880,3185 2920,3185 2940,3205 2940,3245 2920,3265 2880,3265 2860,3245
  pour cut-out: 2500,2460 2520,2440 2560,2440 2580,2460 2580,2500 2560,2520 2520,2520 2500,2500
  pour cut-out: 1820,2560 1840,2540 1880,2540 1900,2560 1900,2600 1880,2620 1840,2620 1820,2600
  pour cut-out: 1900,2850 1920,2830 1950,2830 1970,2850 1970,2880 1950,2900 1920,2900 1900,2880
  pour cut-out: 2050,2870 2070,2850 2110,2850 2130,2870 2130,2910 2110,2930 2070,2930 2050,2910
  pour cut-out: 1010,2310 1030,2290 1070,2290 1090,2310 1090,2350 1070,2370 1030,2370 1010,2350
  pour cut-out: 910,2310 930,2290 970,2290 990,2310 990,2350 970,2370 930,2370 910,2350

## Text inside footprints (layer, text, board x,y; h text height)
C1: TopOverlay "-" at 3320,400 h60 r180; TopOverlay "-" at 3320,640 h60 r180; TopOverlay "+" at 3440,400 h60 r180; TopOverlay "-" at 3320,560 h60 r180; TopOverlay "-" at 3320,480 h60 r180
C2: TopOverlay "-" at 3210,1865 h60 r270; TopOverlay "-" at 2970,1865 h60 r270; TopOverlay "+" at 3210,1985 h60 r270; TopOverlay "-" at 3050,1865 h60 r270; TopOverlay "-" at 3130,1865 h60 r270
C7: TopOverlay "+" at 1060,2765 h30 r180; TopOverlay "+" at 1060,2865 h30 r180
C8: TopOverlay "+" at 1240,2835 h30; TopOverlay "+" at 1240,2735 h30
C12: TopOverlay "-" at 1860,2010 h60; TopOverlay "-" at 1860,1930 h60; TopOverlay "+" at 1740,2090 h60; TopOverlay "-" at 1860,1850 h60; TopOverlay "-" at 1860,2090 h60
C14: TopOverlay "-" at 2890,2440 h60 r90; TopOverlay "-" at 3130,2440 h60 r90; TopOverlay "+" at 2890,2320 h60 r90; TopOverlay "-" at 3050,2440 h60 r90; TopOverlay "-" at 2970,2440 h60 r90
C16: TopOverlay "+" at 1745,2785 h60 r270; TopOverlay "-" at 1745,2905 h60 r270; TopOverlay "-" at 1505,2905 h60 r270; TopOverlay "-" at 1585,2905 h60 r270; TopOverlay "-" at 1665,2905 h60 r270
D1: TopOverlay "+" at 230,360 h30 r270; TopOverlay "+" at 140,360 h30 r270
D2: TopOverlay "+" at 230,760 h30 r270; TopOverlay "+" at 140,760 h30 r270
D3: TopOverlay "+" at 230,1160 h30 r270; TopOverlay "+" at 140,1160 h30 r270
D4: TopOverlay "+" at 230,1560 h30 r270; TopOverlay "+" at 140,1560 h30 r270
D5: TopOverlay "+" at 230,1960 h30 r270; TopOverlay "+" at 140,1960 h30 r270
D6: TopOverlay "+" at 230,2360 h30 r270; TopOverlay "+" at 140,2360 h30 r270
D7: TopOverlay "+" at 230,2760 h30 r270; TopOverlay "+" at 140,2760 h30 r270
D8: TopOverlay "+" at 230,3160 h30 r270; TopOverlay "+" at 140,3160 h30 r270
SP1: TopOverlay "-" at 2930,3280 h60 r90; TopOverlay "+" at 2930,2730 h60 r90